# EAGLE board arduino_isp_shield (EAGLE 7.2.0)
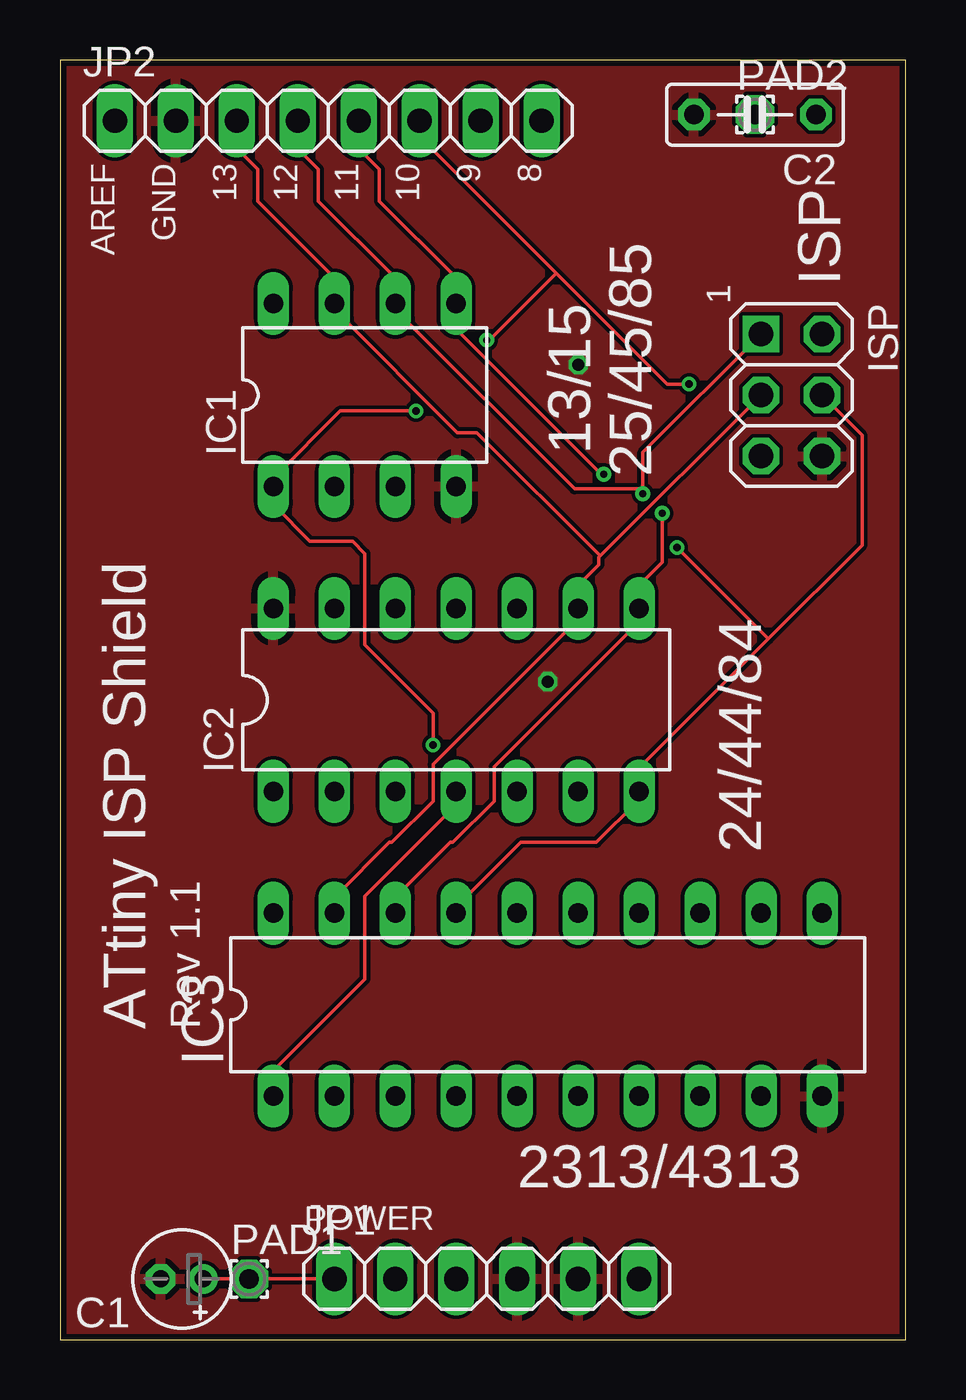
[diagram p0: board, top side]
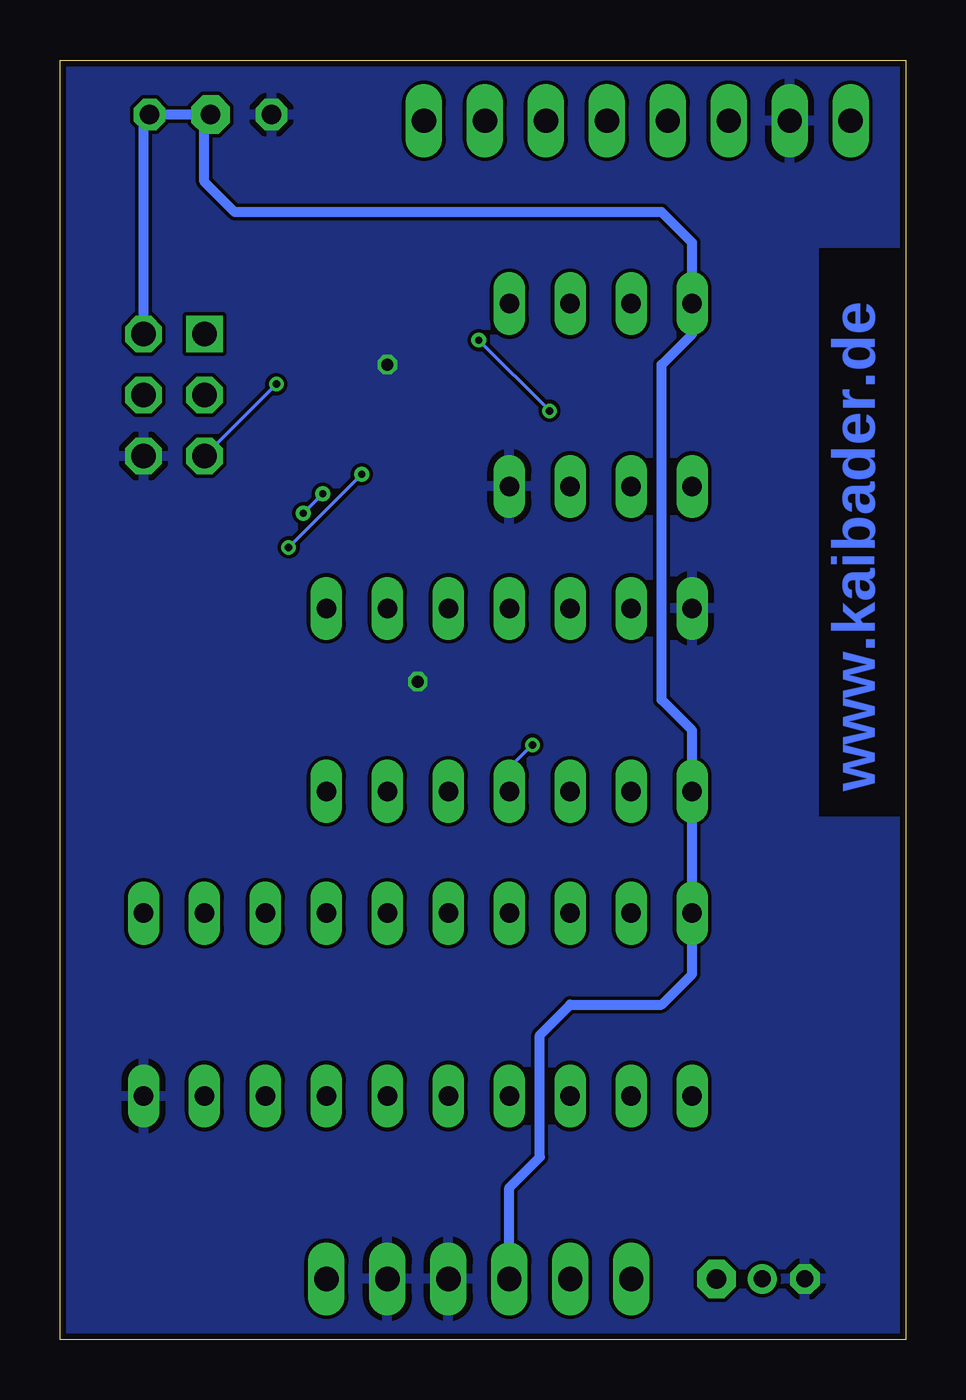
[diagram p1: board, bottom side, seen from below]

Size 35.23 x 53.33 mm. Coordinates in mm from the lower left corner, seen from the top.
Outline: 0,0 35.23,0 35.23,53.33 0,53.33 0,0
Copper layers (1*16): Top 0.035mm / dielectric 1.5mm / Bottom 0.035mm
Design rules "default": minimum track width 6mil, minimum drill 12mil, track to track 6mil, track to pad 6mil, pad to pad 6mil, via to via 6mil, smd to smd 0mil, copper to edge 10mil, drill to drill 10mil, minimum pad ring 10mil, minimum via ring 6mil, stop-mask expansion 2mil, vias tented up to drill 100mil, thermal gap 10mil

## Footprints (pad centres in the part's own frame; a part is rotated, then mirrored left to right if it is on the bottom)
E1,8-4 = drill 0.711 pad 1.168: + -0.889,0 | drill 0.711 pad 1.168 octagon: - 0.889,0
C050-025X075 = drill 0.813 octagon: 1 -2.54,0; 2 2.54,0
DIL08 = drill 0.813 long: 1 -3.81,-3.81; 2 -1.27,-3.81; 3 1.27,-3.81; 4 3.81,-3.81; 5 3.81,3.81; 6 1.27,3.81; 7 -1.27,3.81; 8 -3.81,3.81
DIL14 = drill 0.813 long: 1 -7.62,-3.81; 2 -5.08,-3.81; 3 -2.54,-3.81; 4 0,-3.81; 5 2.54,-3.81; 6 5.08,-3.81; 7 7.62,-3.81; 8 7.62,3.81; 9 5.08,3.81; 10 2.54,3.81; 11 0,3.81; 12 -2.54,3.81; 13 -5.08,3.81; 14 -7.62,3.81
DIL20 = drill 0.813 long: 1 -11.43,-3.81; 2 -8.89,-3.81; 3 -6.35,-3.81; 4 -3.81,-3.81; 5 -1.27,-3.81; 6 1.27,-3.81; 7 3.81,-3.81; 8 6.35,-3.81; 9 8.89,-3.81; 10 11.43,-3.81; 11 11.43,3.81; 12 8.89,3.81; 13 6.35,3.81; 14 3.81,3.81; 15 1.27,3.81; 16 -1.27,3.81; 17 -3.81,3.81; 18 -6.35,3.81; 19 -8.89,3.81; 20 -11.43,3.81
AVR-ISP = drill 1.016 octagon: GND 2.54,1.27; MOSI 0,1.27; RESET 2.54,-1.27; SCK 0,-1.27; VCC -2.54,1.27 | drill 1.016 square: MISO -2.54,-1.27
1X06 = drill 1.016 long: 1 -6.35,0; 2 -3.81,0; 3 -1.27,0; 4 1.27,0; 5 3.81,0; 6 6.35,0
1X08 = drill 1.016 long: 1 -8.89,0; 2 -6.35,0; 3 -3.81,0; 4 -1.27,0; 5 1.27,0; 6 3.81,0; 7 6.35,0; 8 8.89,0
1,6/0,8 = drill 0.813 pad 1.6 octagon: 1 0,0

## Placement (x,y rotation side)
C1  10uF  [E1,8-4]  5.08,2.54 180 top
C2  0.1uF  [C050-025X075]  28.96,51.05 180 top
IC1  IC1-ATTINY  [DIL08]  12.7,39.37 0 top
IC2  IC2-ATTINY  [DIL14]  16.51,26.67 0 top
IC3  IC3-ATTINY  [DIL20]  20.32,13.97 0 top
ISP  [AVR-ISP]  30.48,39.37 270 top
JP1  [1X06]  17.78,2.54 0 top
JP2  [1X08]  11.18,50.8 0 top
PAD1  [1,6/0,8]  7.87,2.54 0 top
PAD2  [1,6/0,8]  28.96,51.05 0 top

## Library data of the parts
C1 C2 = rcl
IC1 = kaibader; OC_FARNELL: unknown; OC_NEWARK: unknown
IC2 IC3 ISP = kaibader
JP1 JP2 = pinhead
PAD1 PAD2 = wirepad

## Nets
GND: C1.- C2.2 IC1.4 IC2.14 IC3.10 ISP.GND JP1.4 JP1.5 JP2.2
MISO: IC1.6 IC2.8 IC3.18 ISP.MISO JP2.4
MOSI: IC1.5 IC2.7 IC3.17 ISP.MOSI JP2.5
N$1: C1.+ JP1.1 PAD1.1
RESET: IC1.1 IC2.4 IC3.1 ISP.RESET JP2.6
SCK: IC1.7 IC2.9 IC3.19 ISP.SCK JP2.3
VCC: C2.1 IC1.8 IC2.1 IC3.20 ISP.VCC JP1.3 PAD2.1

## Tracks (layer width: path | path; a pad name or v marks a point on that pad's centre or on a via)
GND  (via drill 0.5 pad 0.25)
  other vias: 21.59,40.64 20.32,27.43
  pour Bottom: 35.56,0 0,0 0,21.59 3.81,21.59 3.81,45.72 0,45.72 0,53.34 35.56,53.34
  pour Top: 0,53.34 35.56,53.34 35.56,0 0,0
MISO  (via drill 0.3)
  Top 0.152: JP2.4 9.96,50.8 9.96,49.58 10.77,48.77 10.77,47.45 13.92,44.3 13.92,43.18 IC1.6 14.02,43.18 14.02,42.88 21.44,35.46 24.28,35.46 | IC3.18 14.02,17.78 14.02,18.49 16.26,20.73 16.36,20.73 18.09,22.45 18.09,23.88 24.08,29.87 24.08,30.48 IC2.8 24.18,30.48 24.18,31.5 25.09,32.41 v25.09,34.44 | ISP.MISO 24.28,36.98 24.28,35.46 | 24.28,35.46 v24.28,35.26
  Bottom 0.152: v25.09,34.44 v24.28,35.26
MOSI  (via drill 0.3)
  Top 0.152: JP2.5 12.5,50.8 12.5,49.58 13.31,48.77 13.31,47.45 16.46,44.3 16.46,43.18 IC1.5 16.56,43.18 16.56,42.06 22.55,36.07 v22.66,36.07 | IC3.17 16.56,17.78 16.56,18.09 19.2,20.73 22.35,20.73 24.08,22.45 24.08,22.86 IC2.7 24.18,22.86 24.18,23.88 29.52,29.21 | ISP.MOSI 33.43,37.69 33.43,33.12 29.52,29.21 | 29.52,29.21 v25.7,33.02
  Bottom 0.152: v25.7,33.02 v22.66,36.07
N$1
  Top 0.152: C1.+ PAD1.1 JP1.1
RESET  (via drill 0.3)
  Top 0.152: 20.68,44.45 25.3,39.83 v26.21,39.83 | 20.68,44.45 15.04,50.09 15.04,50.8 JP2.6 | IC3.1 8.94,10.16 8.94,11.28 12.7,15.04 12.7,18.49 16.46,22.25 16.46,22.86 IC2.4 | 8.94,35.56 8.94,34.75 10.41,33.27 12.19,33.27 12.7,32.77 12.7,28.96 15.54,26.11 v15.54,24.79 | 20.68,44.45 17.88,41.66 v17.78,41.66 | v14.83,38.71 11.68,38.71 8.94,35.97 8.94,35.56 | 8.94,35.56 IC1.1
  Bottom 0.152: ISP.RESET v26.21,39.83 | v15.54,24.79 16.46,23.88 16.46,22.86 IC2.4 | v14.83,38.71 v17.78,41.66
SCK
  Top 0.152: JP2.3 7.42,50.8 7.42,49.58 8.23,48.77 8.23,47.45 11.38,44.3 11.38,43.18 IC1.7 11.48,43.18 11.48,42.88 16.56,37.8 17.37,37.8 22.5,32.66 | IC3.19 11.48,17.78 11.48,18.49 13.72,20.73 13.82,20.73 15.54,22.45 15.54,23.98 21.54,29.97 21.54,30.48 IC2.9 21.64,30.48 21.64,31.5 22.45,32.31 22.45,32.61 22.5,32.66 | 22.5,32.66 ISP.SCK
VCC
  Bottom 0.152: PAD2.1 29.36,50.9 29.21,50.8
  Bottom 0.406: JP1.3 16.51,6.35 15.24,7.62 15.24,12.7 13.97,13.97 10.16,13.97 8.89,15.24 IC3.20 IC2.1 8.89,25.4 10.16,26.67 10.16,40.64 8.89,41.91 IC1.8 8.89,45.72 10.16,46.99 27.94,46.99 29.21,48.26 29.21,50.8 | PAD2.1 C2.1 31.75,50.8 ISP.VCC

## Text on the board
Bottom: www.kaibader.de
tPlace: AREF | GND | 13 | 12 | 11 | 10 | 9 | 8 | 25/45/85 | ISP | 13/15 | 1 | 24/44/84 | ATtiny ISP Shield | Rev 1.1 | 2313/4313 | POWER